# Altium PCB VLC.PcbDoc
Units mil, origin at the board's own origin, x right, y up, seen from the top; angles counter-clockwise.
Board outline 6000 x 5000 mil, 2 copper layers (Top Layer, Bottom Layer); 55 components, 147 nets, 405 pads, 0 vias.
Unrouted connection lines stored in the file: 251.
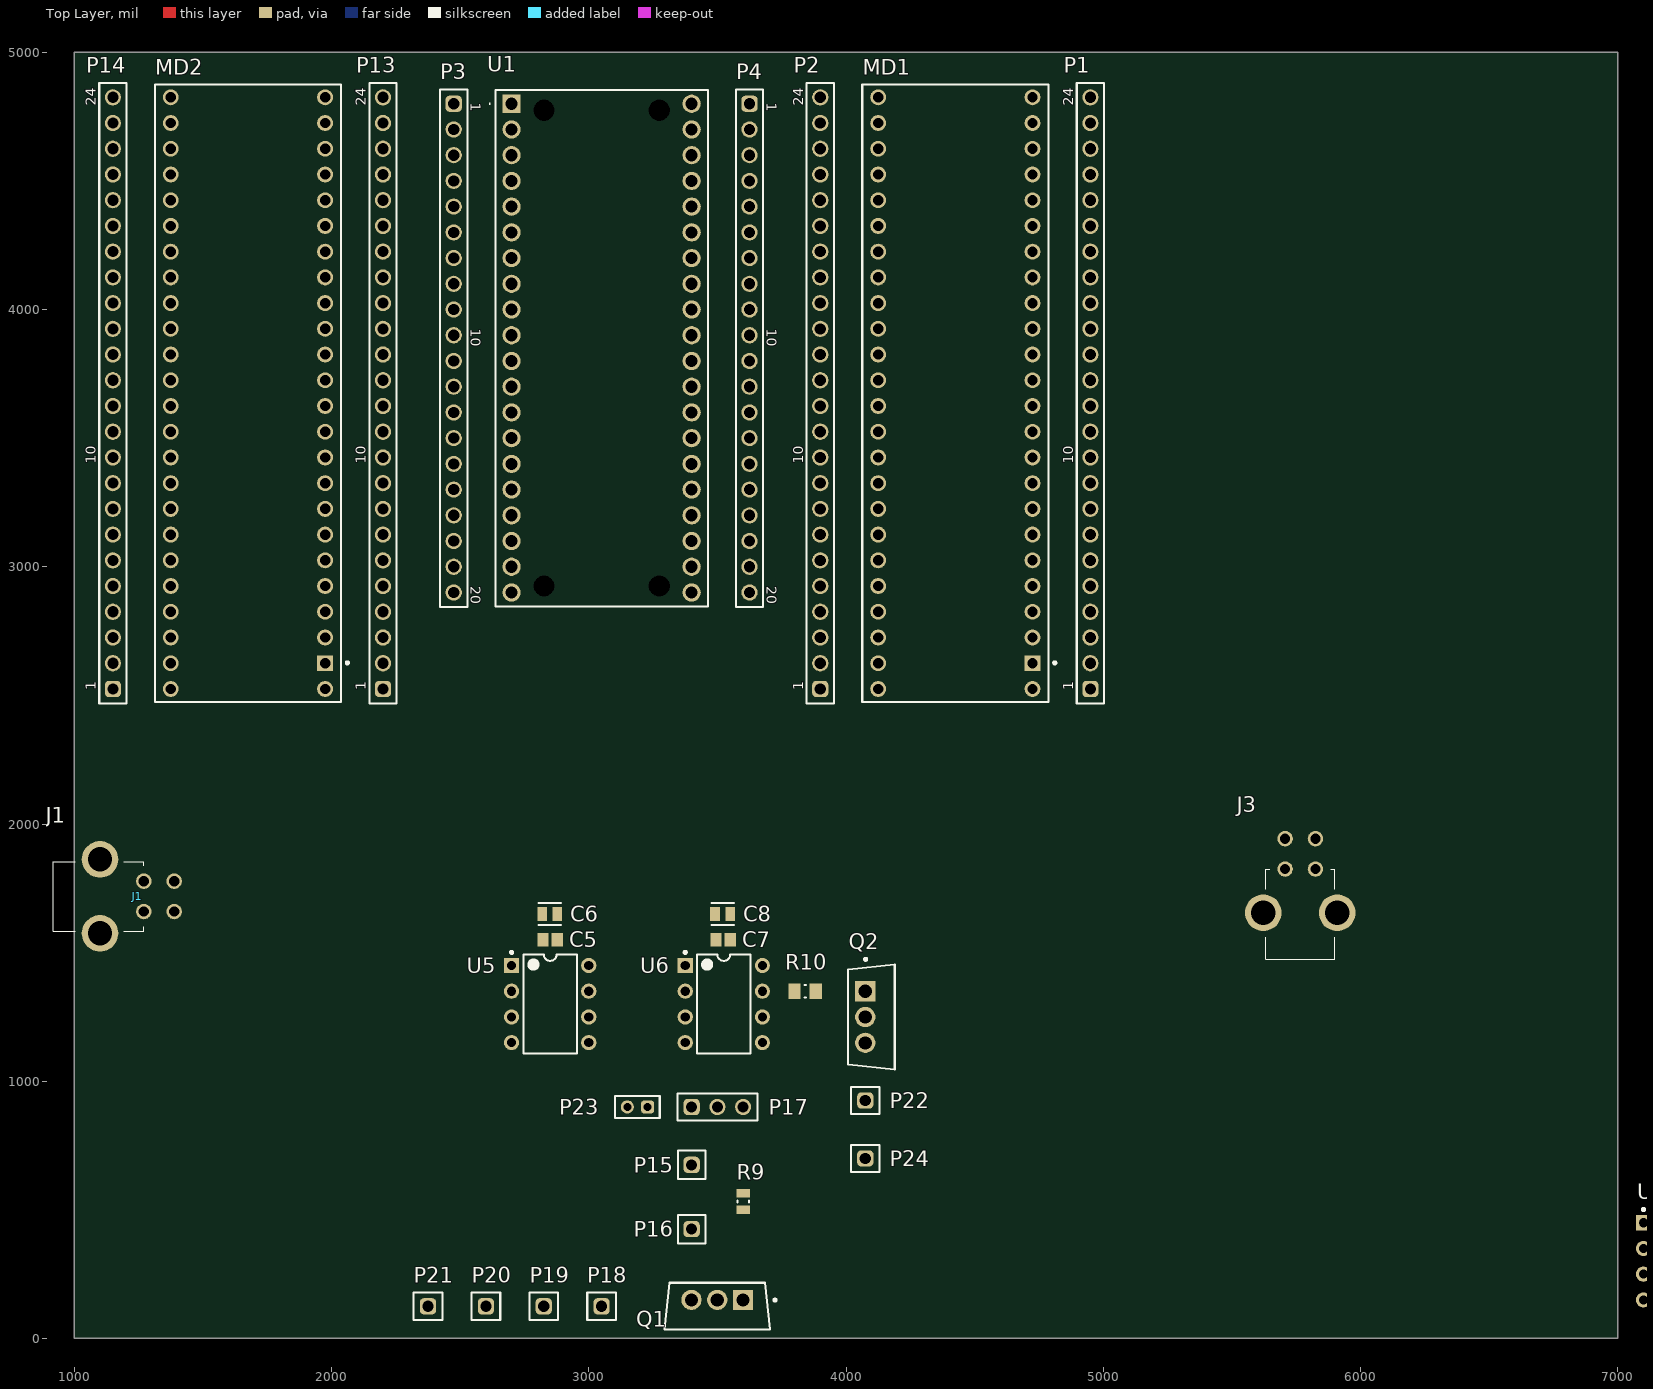
[diagram p0: Top Layer view]
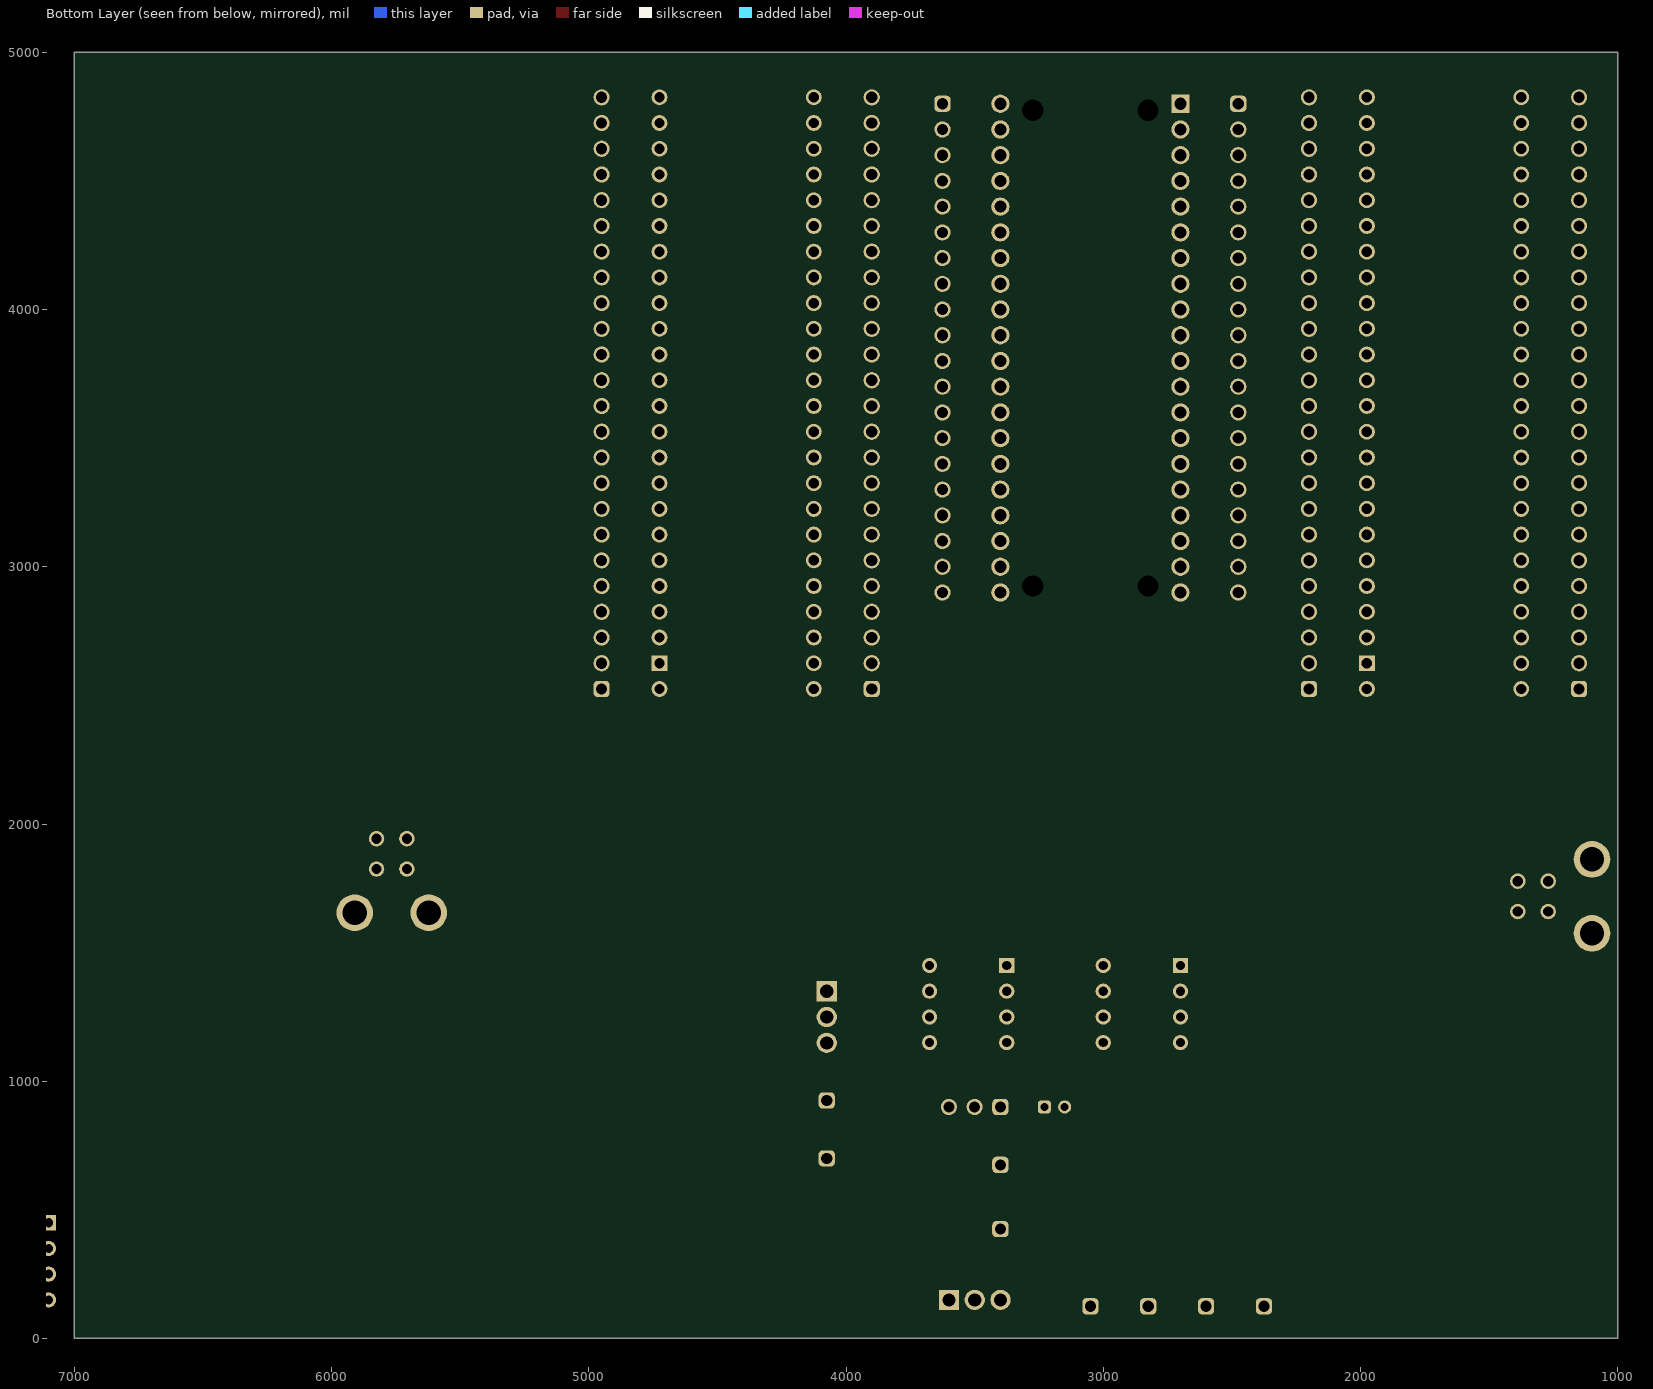
[diagram p1: Bottom Layer view, seen from below]

## Layer stack, top to bottom
Top Solder: solder mask 0.4, Solder Resist, Dk 3.5
Top Layer: signal copper 1.4
Dielectric 1: dielectric 12.6, FR-4, Dk 4.8
Bottom Layer: signal copper 1.4
Bottom Solder: solder mask 0.4, Solder Resist, Dk 3.5

## Board outline
1000,0 7000,0 7000,5000 1000,5000

## Design rules (kind name [scope] priority, off if disabled: settings)
Clearance [All] p1: gap=10 ignorepadtopadclearanceinfootprint=FALSE
PolygonConnect [All] p1: connectstyle=Relief reliefconductorwidth=10 reliefentries=4 polygonreliefangle="90 Angle" airgapwidth=10
RoutingVias [All] p1: holewidth=28 width=50 viastyle="Through Hole" minholewidth=28 minwidth=50 maxholewidth=28 maxwidth=50
SolderMaskExpansion [All] p1: expansion=4 istentingtop=FALSE
Width [All] p1: maxlimit=10 minlimit=10 preferedwidth=10
30 further rules are at their usual default settings.

## Classes and differential pairs
component class VLC: J1 J2 J3
component class U_Transimpedance: C1 C2 C3 C4 P5 P6 P7 P8 P9 P10 P11 P12 R1 R2 R3 R4 R5 R6 R7 R8 U4
component class U_Transconductance: C5 C6 C7 C8 P15 P16 P17 P18 P19 P20 P21 P22 P23 P24 Q1 Q2 R9 R10 U5 U6
component class U_Pico: P3 P4 U1
component class U_ModTeensy: MD2 P13 P14
component class U_DemodTeensy: MD1 P1 P2

## Components (designator, comment, footprint, x,y, rotation, side; value= is the part's Value field where it differs from the comment)
C1 "1nF" FP-0805-L_2_01_0_2-W_1_25-IPC_C 10100,10300 r0 top
C2 "1.5nF" CAPC2013X94X50ML20T25 9900,10200 r0 top
C3 "3.9nF" FP-C0805C-DN-MFG 9500,10300 r0 top value="3,900 pF"
C4 "1nF" FP-0805-L_2_01_0_2-W_1_25-IPC_C 9700,10300 r0 top
C5 "1uF" CAPC2013X145X50LL20T25 2850,1550 r180 top
C6 "100nF" FP-C0805C-DN-MFG 2848.03,1650 r0 top value="0.10 μF"
C7 "1uF" CAPC2013X145X50LL20T25 3522.44,1550 r180 top
C8 "100nF" FP-C0805C-DN-MFG 3520.47,1650 r0 top value="0.10 μF"
J1 "3-794677-4" 37946774 1270.08,1777.76 r270 top
J2 "3-794677-4" 37946774 7900,10900 r0 top
J3 "3-794677-4" 37946774 5706.89,1825 r0 top
MD1 "teensy 4.1" FP-DEV-16996-MFG 4425,3675 r90 top
MD2 "teensy 4.1" FP-DEV-16996-MFG 1675,3675 r90 top
P1 "61302411121" 61302411121 4950,3675 r90 top
P2 "61302411121" 61302411121 3900,3675 r90 top
P3 "61302011121" 61302011121 2475,3850 r270 top
P4 "61302011121" 61302011121 3625,3850 r270 top
P5 "61300111121" 61300111121 11900,10200 r0 top
P6 "61300111121" 61300111121 12100,10200 r0 top
P7 "61300311121" 61300311121 11500,10100 r90 top
P8 "61300311121" 61300311121 11000,10100 r90 top
P9 "62000211121" 62000211121 7200,10200 r0 top
P10 "62000211121" 62000211121 7400,10200 r0 top
P11 "62000211121" 62000211121 7700,10200 r0 top
P12 "62000211121" 62000211121 7900,10200 r0 top
P13 "61302411121" 61302411121 2200,3675 r90 top
P14 "61302411121" 61302411121 1150,3675 r90 top
P15 "61300111121" 61300111121 3400,675 r90 top
P16 "61300111121" 61300111121 3400,425 r90 top
P17 "61300311121" 61300311121 3500,900 r0 top
P18 "61300111121" 61300111121 3050,125 r0 top
P19 "61300111121" 61300111121 2825,125 r0 top
P20 "61300111121" 61300111121 2600,125 r0 top
P21 "61300111121" 61300111121 2375,125 r0 top
P22 "61300111121" 61300111121 4075,925 r0 top
P23 "62000211121" 62000211121 3189.37,900 r180 top
P24 "61300111121" 61300111121 4075,700 r0 top
Q1 "TIP31C" FP-TO-220-P0A0015988-MFG 3499.61,126.08 r270 top
Q2 "TIP31C" FP-TO-220-P0A0015988-MFG 4098.92,1249.61 r0 top
R1 "15k" RESC2013X55X40NL15T20 11700,10300 r0 top
R2 "15k" RESC2013X55X40NL15T20 11400,10300 r0 top
R3 "1M" RESC2013X60X40LL20T25 11200,10300 r0 top
R4 "620" RESC2013X70X40LL20T20 10200,10300 r0 top
R5 "1.1k" RESC2013X50X30LL20T20 10400,10300 r0 top
R6 "15k" RESC2013X55X40NL15T20 9300,10100 r0 top
R7 "15k" RESC2013X55X40NL15T20 9200,10300 r0 top
R8 "15k" RESC2013X55X40NL15T20 8100,10300 r0 top
R9 "470" RESC2013X50X30LL20T20 3600,532.48 r270 top
R10 "150" FP-CRCW0805-e3-IPC_A 3841.37,1350 r0 top
U1 "RASPBERRY_PI_PICO_WH" RASPBERRYPIPICOWH 2700,4800 r0 top
U2 "MCP6022-E/P" PDIP300-P8 8900,10100 r0 top
U3 "MCP6022-E/P" PDIP300-P8 7250,300 r0 top
U4 "MCP4151-103E/P" PDIP300-P8 8400,10100 r0 top
U5 "MCP4811-E/P" PDIP300-P8 2850,1300 r0 top
U6 "MCP6022-E/P" PDIP300-P8 3525,1300 r0 top

## Footprints (in the part's own frame and the unit in brackets; to place one, negate y for a bottom-side part, rotate by r counter-clockwise, add the part's x,y. Pads: shape width x height; smd on the part's side, far side on the other; paste and mask are expansions set on the pad)
37946774 [mm]
  round 1.53 hole 1.02: 1(0,0) 2(0,3) 3(3,0) 4(3,3)
  round 3.615 hole 2.41: MH1(-2.15,-4.32) MH2(5.15,-4.32)
  silkscreen extent -1.93,-8.92 4.93,0, body extent -3.5,-8.99 6.5,3.25, height 8.59
61300111121 [mm] "Pin Header, pitch 2.54 mm, THT, Vertical, single row, 1p"
  rrect50% 1.6x1.6 hole 1.1: 1(0,0)
  silkscreen extent -1.42,-1.35 1.42,1.35, body extent -1.27,-1.27 1.27,1.27, height 8.57
61300311121 [mm] "Pin Header, pitch 2.54 mm, THT, Vertical, single row, 3p"
  rrect50% 1.6x1.6 hole 1.1: 1(-2.54,0)
  round 1.6 hole 1.1: 2(0,0) 3(2.54,0)
  silkscreen extent -3.96,-1.35 3.96,1.35, body extent -3.81,-1.27 3.81,1.27, height 8.57
61302011121 [mm] "Pin Header, pitch 2.54 mm, THT, Vertical, single row, 20p"
  rrect50% 1.6x1.6 hole 1.1: 1(-24.13,0)
  round 1.6 hole 1.1: 2(-21.59,0) 3(-19.05,0) 4(-16.51,0) 5(-13.97,0) 6(-11.43,0) 7(-8.89,0) 8(-6.35,0) 9(-3.81,0) 10(-1.27,0) 11(1.27,0) 12(3.81,0) 13(6.35,0) 14(8.89,0) 15(11.43,0) 16(13.97,0) 17(16.51,0) 18(19.05,0) 19(21.59,0) 20(24.13,0)
  silkscreen extent -25.55,-1.35 25.55,1.35, body extent -25.4,-1.27 25.4,1.27, height 8.57
61302411121 [mm] "Pin Header, pitch 2.54 mm, THT, Vertical, single row, 24p"
  rrect50% 1.6x1.6 hole 1.1: 1(-29.21,0)
  round 1.6 hole 1.1: 2(-26.67,0) 3(-24.13,0) 4(-21.59,0) 5(-19.05,0) 6(-16.51,0) 7(-13.97,0) 8(-11.43,0) 9(-8.89,0) 10(-6.35,0) 11(-3.81,0) 12(-1.27,0) 13(1.27,0) 14(3.81,0) 15(6.35,0) 16(8.89,0) 17(11.43,0) 18(13.97,0) 19(16.51,0) 20(19.05,0) 21(21.59,0) 22(24.13,0) 23(26.67,0) 24(29.21,0)
  silkscreen extent -30.63,-1.35 30.63,1.35, body extent -30.48,-1.27 30.48,1.27, height 8.57
62000211121 [mm] "Pin Header, pitch 2.00 mm, THT, Vertical, single row, 2p"
  rrect50% 1.3x1.3 hole 0.8: 1(-1,0)
  round 1.3 hole 0.8: 2(1,0)
  silkscreen extent -2.2,-1.07 2.2,1.07, body extent -2,-1 2,1, height 6.05
CAPC2013X94X50ML20T25 [mm] "Chip Capacitor, 2-Leads, Body 2.01x1.25mm, IPC Low Density"
  rect 1.55x1.55 smd: 1(-0.925,0) 2(0.925,0)
  body extent -1.1,-0.72 1.11,0.72, height 0.94
CAPC2013X145X50LL20T25 [mm] "Chip Capacitor, 2-Leads, Body 2.00x1.25mm, IPC High Density"
  rect 1.1x1.35 smd: 1(-0.7,0) 2(0.7,0)
  body extent -1.1,-0.72 1.1,0.72, height 1.45
FP-0805-L_2_01_0_2-W_1_25-IPC_C [mil]
  rect 43.49x53.39 smd paste+0 mask+0: 1(-27.79,0) 2(27.79,0)
  silkscreen extent -50,-44 50,44, body extent -53,-32 53,32, height 10
FP-C0805C-DN-MFG [mm]
  rect 0.95x1.35 smd paste+0 mask+0: 1(-0.75,0) 2(0.75,0)
  silkscreen extent -1.1,-1.07 1.1,1.07, body extent -1.4,-0.85 1.4,0.85, height 0.25
FP-CRCW0805-e3-IPC_A [mil]
  rect 47.5x59.38 smd paste+0 mask+0: 1(-41.37,0) 2(41.37,0)
  silkscreen extent -3,-25 3,25, body extent -85,-49 85,49, height 10
FP-DEV-16996-MFG [mm]
  rect 1.57x1.57 hole 1.02 paste-2539.97 mask+0: 0(-26.67,-7.62)
  round 1.57 hole 1.02 paste-2539.97 mask+0: 1(-24.13,-7.62) 2(-21.59,-7.62) 3(-19.05,-7.62) 4(-16.51,-7.62) 5(-13.97,-7.62) 6(-11.43,-7.62) 7(-8.89,-7.62) 8(-6.35,-7.62) 9(-3.81,-7.62) 10(-1.27,-7.62) 11(1.27,-7.62) 12(3.81,-7.62) 13(3.81,7.62) 14(1.27,7.62) 15(-1.27,7.62) 16(-3.81,7.62) 17(-6.35,7.62) 18(-8.89,7.62) 19(-11.43,7.62) 20(-13.97,7.62) 21(-16.51,7.62) 22(-19.05,7.62) 23(-21.59,7.62) 24(8.89,-7.62) 25(11.43,-7.62) 26(13.97,-7.62) 27(16.51,-7.62) 28(19.05,-7.62) 29(21.59,-7.62) 30(24.13,-7.62) 31(26.67,-7.62) 32(29.21,-7.62) 33(29.21,7.62) 34(26.67,7.62) 35(24.13,7.62) 36(21.59,7.62) 37(19.05,7.62) 38(16.51,7.62) 39(13.97,7.62) 40(11.43,7.62) 41(8.89,7.62) 42(-29.21,7.62) 43(-26.67,7.62) 44(-24.13,7.62) 45(6.35,7.62) 46(-29.21,-7.62) 47(6.35,-7.62)
  silkscreen extent -30.48,-9.95 30.48,9.19, body extent -30.58,-9.29 30.58,9.29, height 0.25
FP-TO-220-P0A0015988-MFG [mm]
  rect 2x2 hole 1.3 paste-2539.97 mask+0: 1(-0.607,2.55)
  round 2 hole 1.3 paste-2539.97 mask+0: 2(-0.607,0) 3(-0.607,-2.55)
  silkscreen extent -2.3,-5.2 2.3,5.82, body extent -2.4,-5.3 2.4,5.3, height 0.25
PDIP300-P8 [mm] "8-Pin Plastic Dual In-Line Package (PDIP)"
  rect 1.5x1.5 hole 0.9: 1(-3.81,3.81)
  round 1.5 hole 0.9: 2(-3.81,1.27) 3(-3.81,-1.27) 4(-3.81,-3.81) 5(3.81,-3.81) 6(3.81,-1.27) 7(3.81,1.27) 8(3.81,3.81)
  silkscreen extent -3.93,-4.9 2.65,5.23, body extent -3.55,-4.9 3.55,4.9, height 4.32
RASPBERRYPIPICOWH [mm]
  rect 1.8x1.8 hole 1.2: 1(0,0)
  round 1.8 hole 1.2: 2(0,-2.54) 3(0,-5.08) 4(0,-7.62) 5(0,-10.16) 6(0,-12.7) 7(0,-15.24) 8(0,-17.78) 9(0,-20.32) 10(0,-22.86) 11(0,-25.4) 12(0,-27.94) 13(0,-30.48) 14(0,-33.02) 15(0,-35.56) 16(0,-38.1) 17(0,-40.64) 18(0,-43.18) 19(0,-45.72) 20(0,-48.26) 21(17.78,-48.26) 22(17.78,-45.72) 23(17.78,-43.18) 24(17.78,-40.64) 25(17.78,-38.1) 26(17.78,-35.56) 27(17.78,-33.02) 28(17.78,-30.48) 29(17.78,-27.94) 30(17.78,-25.4) 31(17.78,-22.86) 32(17.78,-20.32) 33(17.78,-17.78) 34(17.78,-15.24) 35(17.78,-12.7) 36(17.78,-10.16) 37(17.78,-7.62) 38(17.78,-5.08) 39(17.78,-2.54) 40(17.78,0)
  round 1.05 hole 2.1 unplated: MH1(3.19,-0.63) MH2(3.19,-47.63) MH3(14.59,-47.63) MH4(14.59,-0.63)
  silkscreen extent -2.2,-49.63 19.39,1.37, body extent -1.61,-49.63 19.39,1.37, height 4.1
RESC2013X50X30LL20T20 [mm] "Chip Resistor, 2-Leads, Body 2.00x1.25mm, IPC High Density"
  rect 0.85x1.35 smd: 1(-0.825,0) 2(0.825,0)
  silkscreen extent -0.1,-0.58 0.1,0.58, body extent -1.1,-0.72 1.1,0.72, height 0.5
RESC2013X55X40NL15T20 [mm] "Chip Resistor, 2-Leads, Body 2.00x1.25mm, IPC Medium Density"
  rect 1.1x1.4 smd: 1(-0.875,0) 2(0.875,0)
  body extent -1.07,-0.7 1.08,0.7, height 0.55
RESC2013X60X40LL20T25 [mm] "Chip Resistor, 2-Leads, Body 2.00x1.25mm, IPC High Density"
  rect 1x1.35 smd: 1(-0.75,0) 2(0.75,0)
  body extent -1.1,-0.72 1.1,0.72, height 0.6
RESC2013X70X40LL20T20 [mm] "Chip Resistor, 2-Leads, Body 2.00x1.25mm, IPC High Density"
  rect 0.95x1.35 smd: 1(-0.775,0) 2(0.775,0)
  body extent -1.1,-0.72 1.1,0.72, height 0.7

## Part data
C1 C4: library part CMP-1036-02979-3, "General Purpose Ceramic Capacitor, 0805, 1nF, 10%, X7R, 0.15, 50V", Case Code (Imperial)=0805, Case Code (Metric)=2012, Dielectric=X7R, Dielectric Material=Ceramic, Insulation Resistance=100GR, Max Operating Temperature=125°C, Min Operating Temperature=-55°C, Package Quantity=1, Tolerance=10%, Voltage=50V, Capacitance=1nF, Case/Package=0805, Contact Plating=Tin, Depth=1.25mm, Dissipation Factor=2.5%, Height=0.94mm, Lead Free="Lead Free", Length=2.01mm, Mount="Surface Mount", Number of Pins=2, Packaging="Tape and Reel", Radiation Hardening=No, REACH SVHC="No SVHC", RoHS Compliant=Yes, Termination=SMD/SMT, Thickness=0.037inch, Voltage Rating=50V, Voltage Rating (DC)=50V, Width=1.25mm
C2: library part CMP-2007-04179-1, Manufacturer="AVX Interconnect / Elco", Part Number=08051C152KAT2A
C3: library part CMP-2007-03730-2, "CAP CER 3900PF 200V C0G/NP0 0805", Capacitance="3,900 pF", Manufacturer=KEMET, Manufacturer Part Number=C0805C392J2GACAUTO, Package=C0805C-DN, Temperature="-55°C to +125°C", Temperature Characteristic=C0G, Temperature Coefficient=30ppm/°C, Temperature Range High=+125°C, Temperature Range Low=-55°C, Tolerance=0.05, Voltage Rating="200 V", Automotive=No, Category=Cap, ComponentLink2Description=Datasheet, ComponentLink2URL=https://content.kemet.com/datasheets/KEM_C1003_C0G_SMD.pdf, Device Class L1="Passive Components", Device Class L2=Capacitors, Device Class L3="Ceramic Capacitors", Digikey Description="CAP CER 3900PF 200V C0G/NP0 0805", Height=0.88mm, Ipc Land Pattern Name=CAPC200125X78, Lead Free=Yes, Material=Ceramic, Octopart=https://octopart.com/c0805c392j2gacauto-kemet-46733246, RoHS=TRUE
C5 C7: library part CMP-1036-04746-2, Manufacturer=Kemet, Part Number=C0805C105K4PACTU
C6 C8: library part CMP-2007-00274-2, "CAP CER 0.1UF 16V X7R 0805", Capacitance="0.10 μF", Manufacturer=KEMET, Manufacturer Part Number=C0805C104K4RACTU, Package=C0805C-DN, Temperature="-55°C to +125°C", Temperature Characteristic=X7R, Temperature Coefficient=30ppm/°C, Temperature Range High=+125°C, Temperature Range Low=-55°C, Tolerance=0.1, Voltage Rating="16 V", Automotive=No, Category=Cap, ComponentLink2Description=Datasheet, ComponentLink2URL=https://content.kemet.com/datasheets/KEM_C1003_C0G_SMD.pdf, Device Class L1="Passive Components", Device Class L2=Capacitors, Device Class L3="Ceramic Capacitors", Digikey Description="CAP CER 0.1UF 16V X7R 0805", Height=0.88mm, Ipc Land Pattern Name=CAPC200125X78, Lead Free=Yes, Material=Ceramic, Mouser Description="Multilayer Ceramic Capacitors MLCC - SMD/SMT 16volts 0.1uF X7R 10%", Octopart=https://octopart.com/c0805c104k4ractu-kemet-92155, RoHS=TRUE
J1 J2 J3: "Connector", Manufacturer_Name="TE Connectivity", Mouser Part Number=571-3-794677-4, Arrow Part Number=3-794677-4, Arrow Price/Stock=https://www.arrow.com/en/products/3-794677-4/te-connectivity?region=europe, Datasheet Link=https://www.te.com/commerce/DocumentDelivery/DDEController?Action=srchrtrv&DocNm=micro-mate-n-lok-connector-qrg&DocType=Data%20Sheet&DocLang=English&PartCntxt=3-794677-4&DocFormat=pdf, Height=8.67mm, Manufacturer_Part_Number=3-794677-4, Mouser Price/Stock=https://www.mouser.co.uk/ProductDetail/TE-Connectivity-AMP/3-794677-4?qs=6xDM53S3Z3IXPJK6%252BrOgPw%3D%3D
MD1 MD2: library part CMP-157412-000001-1, "TEENSY 4.1 (HEADERS)"
P1 P2 P13 P14: library part CMP-1502-01109-2, Color=Black, Contact Resistance=20mΩ, Current Rating=3A, Operating Supply Voltage=250V, Connector Type="Male Pin", Contact Material=Copper, Contact Mating Length=5.9944mm, Contact Plating=Gold, Gender=Male, Lead Pitch=2.54mm, Mount="Through Hole", NexarPartId=32855561, Number of Contacts=24, Number of Pins=24, Number of Positions=24, Number of Rows=1, Orientation=Vertical, Packaging=Bulk, Pitch=2.54mm, REACH SVHC=Unknown, RoHS=Compliant, Termination=Solder
P3 P4: library part CMP-1502-01102-2, Color=Black, Contact Resistance=20mΩ, Current Rating=3A, Operating Supply Voltage=250V, Connector Type="Male Pin", Contact Material=Copper, Contact Mating Length=5.9944mm, Contact Plating=Gold, Gender=Male, Lead Pitch=2.54mm, Mount="Through Hole", NexarPartId=32855554, Number of Contacts=20, Number of Pins=20, Number of Positions=20, Number of Rows=1, Orientation=Vertical, Packaging=Bulk, Pitch=2.54mm, REACH SVHC=Unknown, RoHS=Compliant, Termination=Solder
P5 P6 P15 P16 P18 P19 P20 P21 P22 P24: library part CMP-1502-01058-2, Color=Black, Contact Resistance=20mΩ, Current Rating=3A, Operating Supply Voltage=250V, Connector Type="Male Pin", Contact Material=Copper, Contact Mating Length=5.9944mm, Contact Plating=Gold, Gender=Male, Lead Pitch=2.54mm, Mount="Through Hole", NexarPartId=32855518, Number of Contacts=1, Number of Pins=1, Number of Positions=1, Number of Rows=1, Orientation=Vertical, Packaging=Bulk, REACH SVHC=Unknown, RoHS=Compliant, Termination=Solder
P7 P8 P17: library part CMP-1502-01062-2, Color=Black, Contact Resistance=20mΩ, Current Rating=3A, Max Operating Temperature=105°C, Min Operating Temperature=-40°C, Operating Supply Voltage=250V, Connector Type="Male Pin", Contact Material=Copper, Contact Mating Length=5.9944mm, Contact Plating=Gold, Gender=Male, Height=8.94mm, Lead Free="Lead Free", Lead Pitch=2.54mm, Mount="Through Hole", NexarPartId=32855521, Number of Contacts=3, Number of Pins=3, Number of Positions=3, Number of Rows=1, Orientation=Vertical, Packaging=Bulk, Pitch=2.54mm, REACH SVHC=Unknown, RoHS=Compliant, Termination=Solder, Voltage Rating=250V
P9 P10 P11 P12 P23: library part CMP-1502-00956-3, Contact Resistance=20mΩ, Current Rating=2A, Max Operating Temperature=105°C, Min Operating Temperature=-40°C, Operating Supply Voltage=200V, Contact Material=Gold, Gender=Male, Height=6.35mm, Lead Pitch=2mm, NexarPartId=61924778, Number of Contacts=2, Number of Pins=2, Number of Rows=1, Orientation=Vertical, RoHS=Non-Compliant, Voltage Rating=200V
Q1 Q2: library part CMP-12195-000001-1, "TRANS NPN 100V 3A TO-220", Collector Base Voltage=100V, Collector Emitter Saturation Voltage=1.2V, Emitter Base Voltage=5V, Manufacturer=STMicroelectronics, Max Collector Current=3A, Max Junction Temp=+150°C, Package=TO-220-P0A0015988, Power Dissipation=2W, Temperature="to +150°C", Automotive=No, Category=Trans, Collector Emitter Voltage=100V, ComponentLink2Description=Datasheet, ComponentLink2URL=https://www.st.com/resource/en/datasheet/tip31c.pdf, Device Class L1="Discrete Semiconductors", Device Class L2=Transistors, Device Class L3=BJTs, Digikey Description="TRANS NPN 100V 3A TO-220", Height=19.68mm, Hfe Max=50, Hfe Min=10, Hfe Testic=3A, Hfe Testvce=4V, Lead Free=Yes, Manufacturer Part Number=TIP31C, Mouser Description="Bipolar Transistors - BJT NPN Gen Pur Power", Number Of Elements=1, Number Of Npn=1, Octopart=https://octopart.com/tip31c-stmicroelectronics-15555, RoHS=TRUE, Standoff Height=3.5mm, Temperature Range High=+150°C
R1 R2 R6 R7 R8: library part CMP-2001-04735-1, Manufacturer="Vishay Dale", Part Number=TNPW080515K0BEEA
R3: library part CMP-2001-00584-1, Manufacturer=Panasonic, Part Number=ERA-6AEB105V
R4: library part CMP-2001-00436-1, Manufacturer=Panasonic, Part Number=ERJ-6GEYJ621V
R5: library part CMP-1013-00514-2, Manufacturer="Vishay Dale", Part Number=CRCW08051K10FKTA
R9: library part CMP-2001-03932-1, Manufacturer="Vishay Dale", Part Number=CRCW0805470RFKEA
R10: library part CMP-2001-04298-2, "RES Thick Film, 150Ω, 5%, 0.125W, 200ppm/°C, 0805", Case Code (Imperial)=0805, Case Code (Metric)=2012, Max Operating Temperature=155°C, Max Power Dissipation=125mW, Min Operating Temperature=-55°C, Package Quantity=1, Resistance=150R, Temperature Coefficient=200ppm/°C, Tolerance=5%, Voltage Rating=150V, Case/Package=0805, Composition="Thick Film", Contact Plating=Tin, Depth=1.25mm, Features="Automotive AEC-Q200", Height=0.02inch, Lead Free="Lead Free", Length=2mm, Military Standard=Not, Mount="Surface Mount", Number of Terminations=2, Packaging="Tape and Reel", Power Rating=125mW, Radiation Hardening=No, Termination=SMD/SMT, Voltage Rating (DC)=150V, Weight=0.000194oz, Width=0.049inch
U1: "Undefined or Miscellaneous", Manufacturer_Name=RASPBERRY-PI, Manufacturer_Part_Number="RASPBERRY PI PICO WH", Datasheet Link=https://datasheets.raspberrypi.com/picow/pico-w-datasheet.pdf, Height=4mm
U2 U3 U6: library part CMP-0187-00090-3, "None", Case/Package=PDIP, Input Bias Current=5nA, Input Offset Voltage (Vos)=250uV, Input Offset Voltage-Max=500uV, Max Operating Temperature=125°C, Max Supply Voltage=5.5V, Min Operating Temperature=-40°C, Min Supply Voltage=2.5V, Nominal Supply Current=1mA, Output Current=22mA, Package Quantity=60, Power Supply Rejection Ratio (PSRR)=74dB, Voltage Gain=110dB, Amplifier Type="GENERAL PURPOSE", Bandwidth=10MHz, Common Mode Rejection Ratio=70dB, Gain Bandwidth Product=10MHz, Harmonic Distortion=0.00053%, Height=0.195inch, Lead Free="Lead Free", Length=0.4inch, Mount="Through Hole", Number of Amplifiers=2, Number of Channels=2, Number of Circuits=2, Number Of Elements=2, Number of Pins=8, Packaging=Rail/Tube, Radiation Hardening=No, REACH SVHC="No SVHC", RoHS Compliant=Yes, Slew Rate=7V/µs, Slew Rate-Nom=7V/µs, Supply Current=1mA, Technology=CMOS, Unity Gain Bandwidth Product=10MHz, Width=0.28inch
U4: library part CMP-0188-00257-2, "7/8-Bit Single/Dual SPI Digital POT with Volatile Memory, 8-Pin PDIP, Extended Temperature", Code_JEDEC=MS-001, ComponentLink1Description="Manufacturer URL", ComponentLink1URL=http://www.microchip.com/, ComponentLink2Description=Datasheet, ComponentLink2URL=http://ww1.microchip.com/downloads/en/DeviceDoc/22060b.pdf, ComponentLink3Description="Package Specification", ComponentLink3URL=http://www.microchip.com/stellent/groups/techpub_sg/documents/packagingspec/en012702.pdf, DatasheetVersion="revB, Dec-2008", PackageDescription="8-Lead Plastic Dual In-Line (P) - 300 mil Body [PDIP]", PackageReference=PDIP300-P8, PackageVersion="revBB, Aug-2009", RevisionNote="URLs added."
U5: library part CMP-0188-01069-1, "10-Bit DACs with Internal VREF and SPI Interface, 8-Pin PDIP, Extended Temperature", Code_JEDEC=MS-001, ComponentLink1Description="Manufacturer URL", ComponentLink1URL=http://www.microchip.com/, ComponentLink2Description=Datasheet, ComponentLink2URL=http://ww1.microchip.com/downloads/en/DeviceDoc/22244B.pdf, ComponentLink3Description="Package Specification", ComponentLink3URL=http://www.microchip.com/stellent/groups/techpub_sg/documents/packagingspec/en012702.pdf, DatasheetVersion="revB, Apr-2010", PackageDescription="8-Lead Plastic Dual In-Line (P) - 300 mil Body [PDIP]", PackageReference=PDIP300-P8, PackageVersion="revBB, Aug-2009"

## Nets (pads, with @x,y where several pads share a name; then routed paths per layer and width w, separated by ;. In a path a pad name is that pad's centre, name@x,y a point inside that pad or via, vN(x,y) a via of type N, cw(c..) or ccw(c..) an arc to the next point about the centre after c; other vN are vias at no path point)
0: MD2.0 P13.2
1: MD2.1 P13.3
2: MD2.2 P13.4
3: MD2.3 P13.5
3V3EN: P4.4 U1.37
3V3L: MD2.44 P14.3
3V3O: P4.5 U1.36
3V3R: MD2.47 P13.15
4: MD2.4 P13.6
5: MD2.5 P13.7
5V: C5.2 C6.1 C7.2 C8.1 J1.2 J1.4 MD1.42 MD2.42 P2.1 P4.1 P14.1 P21.1 R1.2 R7.2 U1.40 U2.8 U3.8 U4.8 U5.1 U6.8
6: MD2.6 P13.8
7: MD2.7 P13.9
8: MD2.8 P13.10
9: MD2.9 P13.11
10: MD2.10 P13.12 U5.2
11: MD2.11 P13.13
12: MD2.12 P13.14
13: MD2.13 P14.14 U5.3 U5.4
14: MD2.14 P14.13
15: MD2.15 P14.12
16: MD2.16 P14.11
17: MD2.17 P14.10
18: MD2.18 P14.9
19: MD2.19 P14.8
20: MD2.20 P14.7
20V: J2.2 J2.4
21: MD2.21 P14.6
22: MD2.22 P14.5
23: MD2.23 P14.4
24: MD2.24 P13.16
25: MD2.25 P13.17
26: MD2.26 P13.18
27: MD2.27 P13.19
28: MD2.28 P13.20
29: MD2.29 P13.21
30: MD2.30 P13.22
31: MD2.31 P13.23
32: MD2.32 P13.24
33: MD2.33 P14.24
34: MD2.34 P14.23
35: MD2.35 P14.22
36: MD2.36 P14.21
37: MD2.37 P14.20
38: MD2.38 P14.19
39: MD2.39 P14.18
40: MD2.40 P14.17
41: MD2.41 P14.16
BUFFER_OUT: P17.2 P23.2 U6.1 U6.2 U6.5
CSn: P4.19 U1.22 U4.1
D0: MD1.0 P1.2
D1: MD1.1 P1.3
D2: MD1.2 P1.4
D3: MD1.3 P1.5
D3V3L: MD1.44 P2.3
D3V3R: MD1.47 P1.15
D4: MD1.4 P1.6
D5: MD1.5 P1.7
D6: MD1.6 P1.8
D7: MD1.7 P1.9
D8: MD1.8 P1.10
D9: MD1.9 P1.11
D10: MD1.10 P1.12
D11: MD1.11 P1.13
D12: MD1.12 P1.14
D13: MD1.13 P2.14
D14: MD1.14 P2.13
D15: MD1.15 P2.12
D16: MD1.16 P2.11
D17: MD1.17 P2.10
D18: MD1.18 P2.9
D19: MD1.19 P2.8
D20: MD1.20 P2.7
D21: MD1.21 P2.6
D22: MD1.22 P2.5
D23: MD1.23 P2.4
D24: MD1.24 P1.16
D25: MD1.25 P1.17
D26: MD1.26 P1.18
D27: MD1.27 P1.19
D28: MD1.28 P1.20
D29: MD1.29 P1.21
D30: MD1.30 P1.22
D31: MD1.31 P1.23
D32: MD1.32 P1.24
D33: MD1.33 P2.24
D34: MD1.34 P2.23
D35: MD1.35 P2.22
D36: MD1.36 P2.21
D37: MD1.37 P2.20
D38: MD1.38 P2.19
D39: MD1.39 P2.18
D40: MD1.40 P2.17
D41: MD1.41 P2.16
DAC_OUT: U5.8 U6.3
FILTERED: C3.2 P8.3 P11.2 U3.1 U3.2 U3.5
GND: C4.2 C5.1 C6.2 C7.1 C8.2 J1.1 J1.3 J1.MH1 J1.MH2 J2.1 J2.3 J2.MH1 J2.MH2 MD1.43 MD1.45 MD1.46 MD2.43 MD2.45 MD2.46 P1.1 P2.2 P2.15 P3.3 P3.8 P3.13 P3.18 P4.3 P4.8 P4.13 P4.18 P9.1 P10.1 P11.1 P12.1 P13.1 P14.2 P14.15 P23.1 P24.1 Q1.2 R2.1 R8.1 U1.3 U1.8 U1.13 U1.18 U1.23 U1.28 U1.33 U1.38 U2.3 U2.4 U3.4 U4.4 U5.5 U5.7 U6.4
GPIO0: P3.1 U1.1
GPIO1: P3.2 U1.2
GPIO2: P3.4 U1.4
GPIO3: P3.5 U1.5
GPIO4: P3.6 U1.6
GPIO5: P3.7 U1.7
GPIO6: P3.9 U1.9
GPIO7: P3.10 U1.10
GPIO8: P3.11 U1.11
GPIO9: P3.12 U1.12
GPIO10: P3.14 U1.14
GPIO11: P3.15 U1.15
GPIO12: P3.16 U1.16
GPIO13: P3.17 U1.17
GPIO14: P3.19 U1.19
GPIO15: P3.20 U1.20
GPIO16: P4.20 U1.21
GPIO18: P4.17 U1.24 U4.2
GPIO19: P4.16 U1.25 U4.3
GPIO20: P4.15 U1.26
GPIO21: P4.14 U1.27
GPIO22: P4.12 U1.29
GPIO26: P4.10 P12.2 U1.31 U3.7 U4.7
GPIO27: P4.9 U1.32
GPIO28: P4.7 U1.34
HPF_OUT: P8.2 P10.2 R6.2 U2.6 U2.7
LED+: J3.2 J3.4
LED-: J3.1 J3.3 Q2.2
NetC1_1: C1.1 C2.2 R6.1
NetC1_2: C1.2 R1.1 R2.2 U2.5
NetC3_1: C3.1 R4.2 R5.1
NetC4_1: C4.1 R5.2 U3.3
NetP5_1: P5.1 R3.1 U2.2
NetP6_1: P6.1 P7.3
NetP7_1: P7.1 R3.2
NetP8_1: P8.1 R4.1
NetP15_1: P15.1 P17.1
NetP16_1: P16.1 Q1.1 R9.2
NetP17_3: P17.3 R9.1
NetP18_1: P18.1 Q1.3
NetP19_1: P19.1 P20.1
NetP22_1: P22.1 Q2.3 U6.6
NetQ2_1: Q2.1 R10.2
NetR7_1: R7.1 R8.2 U4.5
NetR10_1: R10.1 U6.7
RUN: P4.11 U1.30
TIA_OUT: C2.1 P7.2 P9.2 U2.1
VGA-: U3.6 U4.6
VREF: P4.6 U1.35
VSYS: P4.2 U1.39
pads on no net: J3.MH1 J3.MH2 U1.MH1 U1.MH2 U1.MH3 U1.MH4 U5.6

## Text inside footprints (layer, text, board x,y; h text height)
P1: Top Overlay "24" at 4883.07,4792.72 h40 r90; Top Overlay "10" at 4883.07,3400.2 h40 r90; Top Overlay "1" at 4883.07,2520.28 h40 r90
P2: Top Overlay "24" at 3833.07,4792.72 h40 r90; Top Overlay "10" at 3833.07,3400.2 h40 r90; Top Overlay "1" at 3833.07,2520.28 h40 r90
P3: Top Overlay "10" at 2541.93,3924.8 h40 r270; Top Overlay "1" at 2541.93,4804.72 h40 r270; Top Overlay "20" at 2541.93,2924.8 h40 r270
P4: Top Overlay "10" at 3691.93,3924.8 h40 r270; Top Overlay "1" at 3691.93,4804.72 h40 r270; Top Overlay "20" at 3691.93,2924.8 h40 r270
P13: Top Overlay "24" at 2133.07,4792.72 h40 r90; Top Overlay "10" at 2133.07,3400.2 h40 r90; Top Overlay "1" at 2133.07,2520.28 h40 r90
P14: Top Overlay "24" at 1083.07,4792.72 h40 r90; Top Overlay "10" at 1083.07,3400.2 h40 r90; Top Overlay "1" at 1083.07,2520.28 h40 r90